# EAGLE board openDrive_MC_00.28 (EAGLE 5.10), part 1 of 2
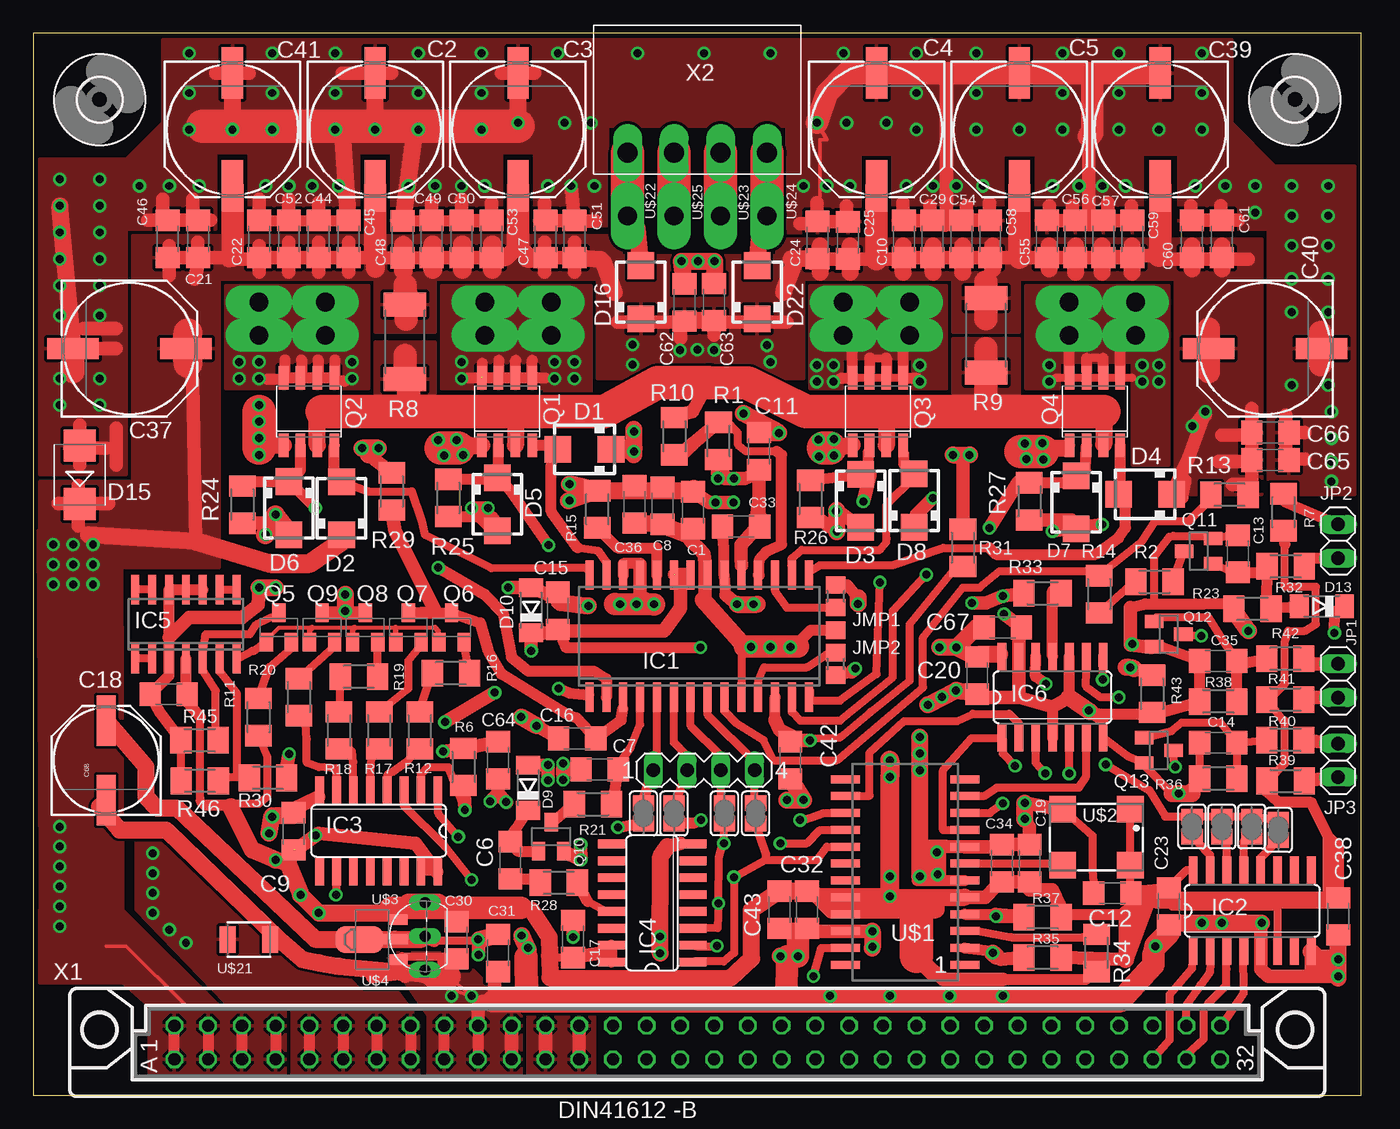
[diagram p0: board, top side]
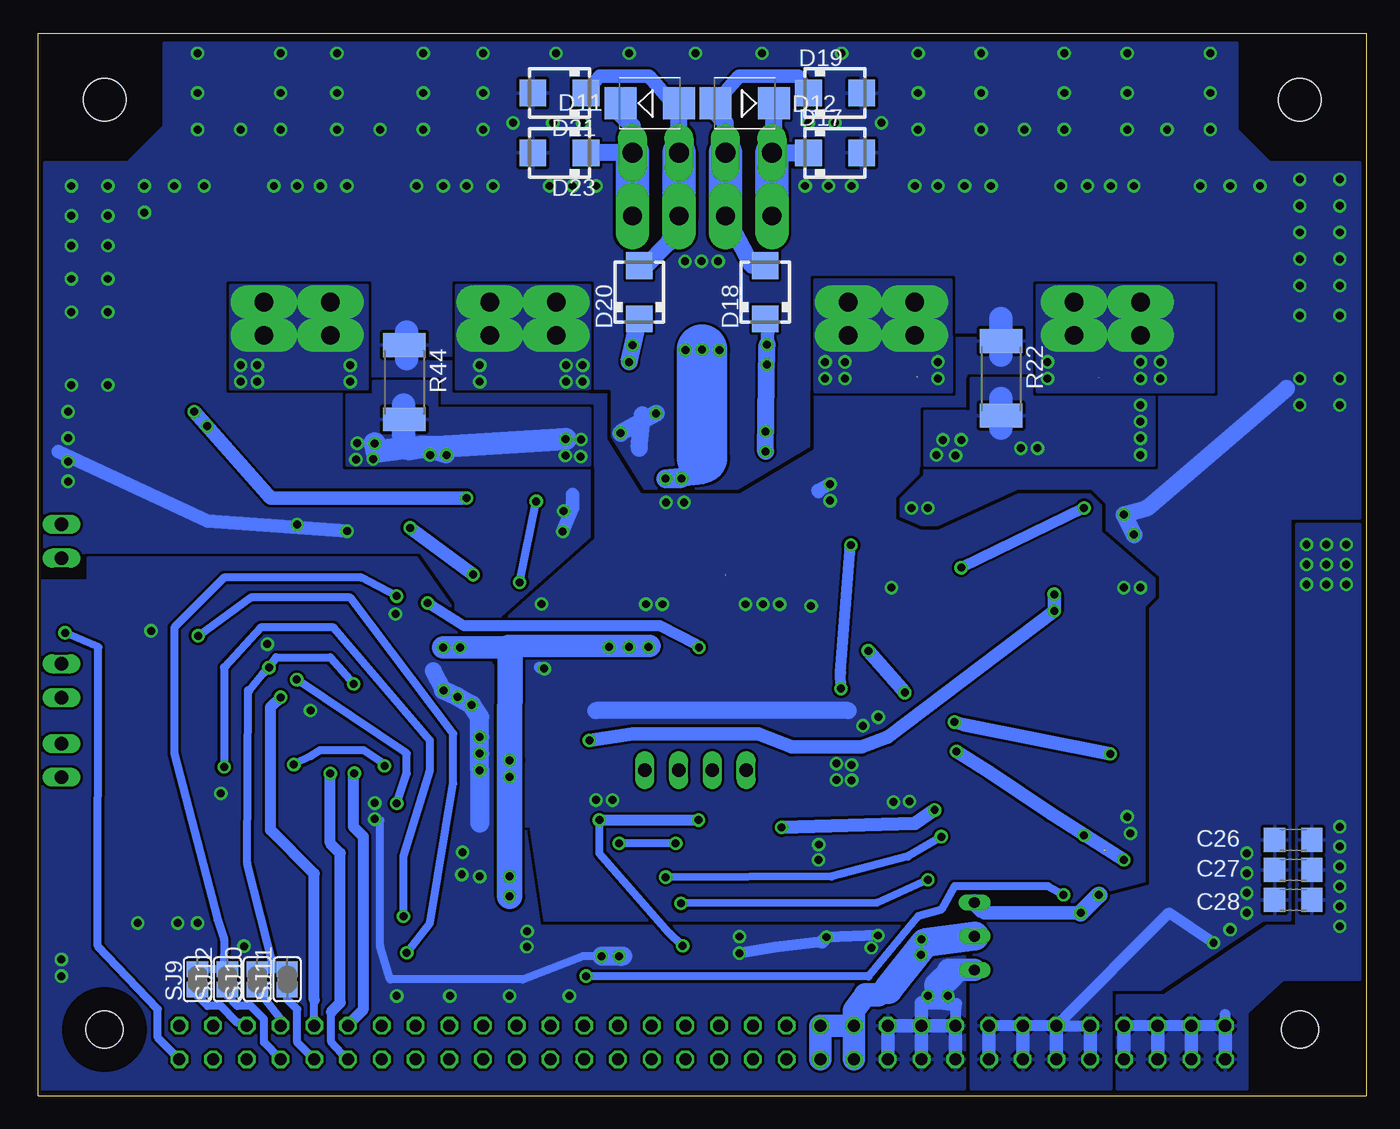
[diagram p1: board, bottom side, seen from below]

Size 100 x 80 mm. Coordinates in mm from the lower left corner, seen from the top.
Outline: 100,0 100,80 0,80 0,0 100,0
Copper layers (1*16): Top 0.035mm / dielectric 1.5mm / Bottom 0.035mm
Design rules "ZWILLING": minimum track width 0.2mm, minimum drill 0.5mm, track to track 0.2mm, track to pad 0.2mm, pad to pad 0.15mm, via to via 0.2mm, smd to smd 0mil, copper to edge 0.2mm, drill to drill 0.2mm, minimum pad ring 0.2mm, minimum via ring 0.2mm, stop-mask expansion 0.1mm, vias tented up to drill 0mil, thermal gap 10mil
bRestrict: 25 lines

## Footprints (pad centres in the part's own frame; a part is rotated, then mirrored left to right if it is on the bottom)
C1206 = smd 1.6 x 1.8: 1 -1.4,0; 2 1.4,0
PANASONIC_G = smd 3.9 x 1.6: + 4.25,0; - -4.25,0
PANASONIC_E = smd 3.8 x 1.4: + 3,0; - -3,0
SMA = smd 2 x 2: A 2,0; C -2,0
SOD80C = smd 1.4 x 1.8: A 1.7,0; C -1.7,0
SMB = smd 2.4 x 2.4: A 2.2,0; C -2.2,0
3,2 = hole 3.2: 0,0
SO28W = smd 0.6 x 2.2: 1 -8.255,-4.6; 2 -6.985,-4.6; 3 -5.715,-4.6; 4 -4.445,-4.6; 5 -3.175,-4.6; 6 -1.905,-4.6; 7 -0.635,-4.6; 8 0.635,-4.6; 9 1.905,-4.6; 10 3.175,-4.6; 11 4.445,-4.6; 12 5.715,-4.6; 13 6.985,-4.6; 14 8.255,-4.6; 15 8.255,4.6; 16 6.985,4.6; 17 5.715,4.6; 18 4.445,4.6; 19 3.175,4.6; 20 1.905,4.6; 21 0.635,4.6; 22 -0.635,4.6; 23 -1.905,4.6; 24 -3.175,4.6; 25 -4.445,4.6; 26 -5.715,4.6; 27 -6.985,4.6; 28 -8.255,4.6
SO16 = smd 0.66 x 2.032: 1 -4.445,-3.073; 2 -3.175,-3.073; 3 -1.905,-3.073; 4 -0.635,-3.073; 5 0.635,-3.073; 6 1.905,-3.073; 7 3.175,-3.073; 8 4.445,-3.073; 9 4.445,3.073; 10 3.175,3.073; 11 1.905,3.073; 12 0.635,3.073; 13 -0.635,3.073; 14 -1.905,3.073; 15 -3.175,3.073; 16 -4.445,3.073
SO14 = smd 0.6 x 2.2: 1 -3.81,-2.6; 2 -2.54,-2.6; 3 -1.27,-2.6; 4 0,-2.6; 5 1.27,-2.6; 6 2.54,-2.6; 7 3.81,-2.6; 8 3.81,2.6; 9 2.54,2.6; 10 1.27,2.6; 11 0,2.6; 12 -1.27,2.6; 13 -2.54,2.6; 14 -3.81,2.6
SO14' = smd 0.66 x 2.032: 1 -3.81,-3.073; 2 -2.54,-3.073; 3 -1.27,-3.073; 4 0,-3.073; 5 1.27,-3.073; 6 2.54,-3.073; 7 3.81,-3.073; 8 3.81,3.073; 9 2.54,3.073; 10 1.27,3.073; 11 0,3.073; 12 -1.27,3.073; 13 -2.54,3.073; 14 -3.81,3.073
B0R-JMP = smd 1.5 x 1.3: 1 0,1.7; 2 0,0; 3 0,-1.7
1X02 = drill 1.016 long: 1 -1.27,0; 2 1.27,0
SO08-IRF = smd 0.72 x 1.78: 1 -1.905,-2.543; 2 -0.635,-2.543; 3 0.635,-2.543; 4 1.905,-2.543; 5 1.905,2.543; 6 0.635,2.543; 7 -0.635,2.543; 8 -1.905,2.543
SOT23-BEC = smd 1 x 1.4: B -0.95,-1.1; C 0,1.1; E 0.95,-1.1
SOT23 = smd 1 x 1.4: 1 -0.95,-1.1; 2 0.95,-1.1; 3 0,1.1
M1206 = smd 1.6 x 2: 1 -1.4,0; 2 1.4,0
R2512 = smd 1.8 x 3.2: 1 -2.8,0; 2 2.8,0
SJ = smd 1.168 x 1.6: 1 -0.762,0; 2 0.762,0
MA04-1 = drill 1.016 long: 1 -3.81,0; 2 -1.27,0; 3 1.27,0; 4 3.81,0
SOP24 = smd 0.6 x 2.2: 1 -6.985,-4.5; 2 -5.715,-4.5; 3 -4.445,-4.5; 4 -3.175,-4.5; 5 -1.905,-4.5; 6 -0.635,-4.5; 7 0.635,-4.5; 8 1.905,-4.5; 9 3.175,-4.5; 10 4.445,-4.5; 11 5.715,-4.5; 12 6.985,-4.5; 13 6.985,4.5; 14 5.715,4.5; 15 4.445,4.5; 16 3.175,4.5; 17 1.905,4.5; 18 0.635,4.5; 19 -0.635,4.5; 20 -1.905,4.5; 21 -3.175,4.5; 22 -4.445,4.5; 23 -5.715,4.5; 24 -6.985,4.5
XO91 = smd 2 x 2: 1 -2.61,-2.07; 2 2.49,-2.07; 3 2.49,2.13; 4 -2.61,2.13
TO92 = drill 0.813 long: 1 -2.54,0; 2 0,0; 3 2.54,0
SOT89 = smd 0.8 x 1.4: 1 -1.499,-1.981; 3 1.499,-1.981 | smd 0.8 x 2.032: 2 0.025,-1.727 | smd 2.032 x 3.65: 4 0,0.94
PAD = drill 1.4 pad 2.54 long: 1 0,0
1210 = smd 1.2 x 2: 1 -1.6,0; 2 1.6,0
FAB64S = drill 0.914 octagon: A1 -1.27,39.37; A2 -1.27,36.83; A3 -1.27,34.29; A4 -1.27,31.75; A5 -1.27,29.21; A6 -1.27,26.67; A7 -1.27,24.13; A8 -1.27,21.59; A9 -1.27,19.05; A10 -1.27,16.51; A11 -1.27,13.97; A12 -1.27,11.43; A13 -1.27,8.89; A14 -1.27,6.35; A15 -1.27,3.81; A16 -1.27,1.27; A17 -1.27,-1.27; A18 -1.27,-3.81; A19 -1.27,-6.35; A20 -1.27,-8.89; A21 -1.27,-11.43; A22 -1.27,-13.97; A23 -1.27,-16.51; A24 -1.27,-19.05; A25 -1.27,-21.59; A26 -1.27,-24.13; A27 -1.27,-26.67; A28 -1.27,-29.21; A29 -1.27,-31.75; A30 -1.27,-34.29; A31 -1.27,-36.83; A32 -1.27,-39.37; B1 1.27,39.37; B2 1.27,36.83; B3 1.27,34.29; B4 1.27,31.75; B5 1.27,29.21; B6 1.27,26.67; B7 1.27,24.13; B8 1.27,21.59; B9 1.27,19.05; B10 1.27,16.51; B11 1.27,13.97; B12 1.27,11.43; B13 1.27,8.89; B14 1.27,6.35; B15 1.27,3.81; B16 1.27,1.27; B17 1.27,-1.27; B18 1.27,-3.81; B19 1.27,-6.35; B20 1.27,-8.89; B21 1.27,-11.43; B22 1.27,-13.97; B23 1.27,-16.51; B24 1.27,-19.05; B25 1.27,-21.59; B26 1.27,-24.13; B27 1.27,-26.67; B28 1.27,-29.21; B29 1.27,-31.75; B30 1.27,-34.29; B31 1.27,-36.83; B32 1.27,-39.37 | hole 2.794: 0.965,-45.009; 0.965,45.009
AKL182-04 = drill 1.5 pad 2.184 long: P$1 -5.25,0; P$2 -1.75,0; P$3 1.75,0; P$4 5.25,0

## Placement (x,y rotation side)
C1  4µ7  [C1206]  49.67,44.08 90 top
C2  330µ  [PANASONIC_G]  25.75,72.75 270 top
C3  330µ  [PANASONIC_G]  36.5,72.75 270 top
C4  330µ  [PANASONIC_G]  63.5,72.75 270 top
C5  330µ  [PANASONIC_G]  74.25,72.75 270 top
C6  10p  [C1206]  35.92,17.73 90 top
C7  680p  [C1206]  42.65,24.57 180 top
C8  100n  [C1206]  47.38,44.42 90 top
C9  100n  [C1206]  19.6,19.9 90 top
C10  4µ7  [C1206]  65.58,64.5 90 top
C11  1µ  [C1206]  54.65,48.52 90 top
C12  100n  [C1206]  81.25,15.25 180 top
C13  4n7  [C1206]  90.7,40.8 90 top
C14  4n7  [C1206]  89.22,26.57 180 top
C15  4µ7  [C1206]  39.5,36.5 90 top
C16  4n7  [C1206]  40.95,26.9 180 top
C17  100n  [C1206]  40.65,11.8 90 top
C18  100n  [C1206]  10.2,30.23 180 top
C19  1µ  [C1206]  75.03,17.5 90 top
C20  100n  [C1206]  71.08,31.62 270 top
C21  4µ7  [C1206]  12.43,64.5 90 top
C22  4µ7  [C1206]  17,64.5 90 top
C23  100n  [C1206]  85.5,14.25 270 top
C24  4µ7  [C1206]  59.05,64.42 90 top
C25  4µ7  [C1206]  61.35,64.4 90 top
C26  100n  [C1206]  5.5,19.25 180 bottom
C27  10n  [C1206]  5.5,17 180 bottom
C28  1n  [C1206]  5.5,14.75 180 bottom
C29  4µ7  [C1206]  67.7,64.5 90 top
C30  1µ  [C1206]  31.88,11.7 270 top
C31  1µ  [C1206]  35,10.75 270 top
C32  100n  [C1206]  58.25,14 270 top
C33  1µ  [C1206]  53.3,42.85 180 top
C34  470n  [C1206]  72.92,17.5 90 top
C35  4n7  [C1206]  89.22,32.73 180 top
C36  1µ  [C1206]  45.27,44.52 90 top
C37  330µ  [PANASONIC_G]  7.25,56.25 0 top
C38  1µ  [C1206]  98.25,13.5 270 top
C39  330µ  [PANASONIC_G]  84.85,72.75 270 top
C40  330µ  [PANASONIC_G]  92.75,56.25 180 top
C41  330µ  [PANASONIC_G]  15,72.75 270 top
C42  4n7  [C1206]  57,25.25 270 top
C43  1µ  [C1206]  56.17,14 270 top
C44  4µ7  [C1206]  21.5,64.5 90 top
C45  4µ7  [C1206]  23.75,64.5 90 top
C46  4µ7  [C1206]  10.12,64.5 90 top
C47  4µ7  [C1206]  38.58,64.5 90 top
C48  4µ7  [C1206]  27.82,64.47 90 top
C49  4µ7  [C1206]  30,64.5 90 top
C50  4µ7  [C1206]  32.25,64.5 90 top
C51  4µ7  [C1206]  40.75,64.5 90 top
C52  4µ7  [C1206]  19.25,64.5 90 top
C53  4µ7  [C1206]  34.5,64.5 90 top
C54  4µ7  [C1206]  69.9,64.5 90 top
C55  4µ7  [C1206]  76.33,64.5 90 top
C56  4µ7  [C1206]  78.45,64.5 90 top
C57  4µ7  [C1206]  80.58,64.5 90 top
C58  4µ7  [C1206]  72.05,64.5 90 top
C59  4µ7  [C1206]  82.75,64.5 90 top
C60  4µ7  [C1206]  87.25,64.5 90 top
C61  4µ7  [C1206]  89.5,64.5 90 top
C62  1n  [C1206]  49.05,59.73 90 top
C63  1n  [C1206]  51.27,59.75 90 top
C64  100n  [C1206]  35,25.25 270 top
C65  100n  [C1206]  93.15,47.85 0 top
C66  1µ  [C1206]  93.15,49.92 0 top
C67  4µ7  [C1206]  73,35.25 0 top
C68  220µ  [PANASONIC_E]  5.5,25.25 90 top
D1  SS14  [SMA]  41.51,48.66 180 top
D2  SS14  [SMA]  23.22,44.22 90 top
D3  SS14  [SMA]  66.33,44.81 90 top
D4  SS14  [SMA]  83.72,45.29 180 top
D5  SS14  [SMA]  34.94,44.53 270 top
D6  SS14  [SMA]  19.26,44.24 270 top
D7  SS14  [SMA]  78.51,44.68 270 top
D8  SS14  [SMA]  62.3,44.78 270 top
D9  BAS32  [SOD80C]  37.27,23.18 90 top
D10  3V0  [SOD80C]  37.48,36.55 90 top
D11  P6SMB 33CA  [SMB]  53.95,74.72 0 bottom
D12  P6SMB 33CA  [SMB]  46.8,74.72 180 bottom
D13  BAS32  [SOD80C]  97.03,36.85 180 top
D15  P6SMB 33CA  [SMB]  3.5,46.75 90 top
D16  SS14  [SMA]  45.75,60.5 90 top
D17  SS14  [SMA]  40,71 0 bottom
D18  SS14  [SMA]  45.25,60.5 90 bottom
D19  SS14  [SMA]  40,75.5 0 bottom
D20  SS14  [SMA]  54.75,60.5 90 bottom
D21  SS14  [SMA]  60.75,75.5 180 bottom
D22  SS14  [SMA]  54.5,60.5 90 top
D23  SS14  [SMA]  60.75,71 180 bottom
H1  MOUNT-HOLE3.2  [3,2]  5,75 0 top
H2  MOUNT-HOLE3.2  [3,2]  95,75 0 top
IC1  TMC249  [SO28W]  50.14,34.6 0 top
IC2  74HC138D  [SO16]  91.78,13.92 0 top
IC3  4094D  [SO16]  26.02,19.94 180 top
IC4  4094D  [SO16]  46.6,14.51 90 top
IC5  LM324D  [SO14]  11.5,35.5 0 top
IC6  74HC125D  [SO14']  76.75,30 0 top
JMP1  0R-JUMPB  [B0R-JMP]  60.42,33.35 0 top
JMP2  0R-JUMPB  [B0R-JMP]  60.42,36.75 180 top
JP1  Left Ref. Switch  [1X02]  98.25,31.25 90 top
JP2  STOP Switch  [1X02]  98.25,41.75 270 top
JP3  Right Ref. Switch  [1X02]  98.25,25.25 90 top
Q1  FDS8960  [SO08-IRF]  35.67,51.51 0 top
Q2  FDS8960  [SO08-IRF]  20.76,51.51 0 top
Q3  FDS8960  [SO08-IRF]  63.6,51.51 0 top
Q4  FDS8960  [SO08-IRF]  79.94,51.51 0 top
Q5  BC856ASMD  [SOT23-BEC]  18.5,35.25 0 top
Q6  BC856ASMD  [SOT23-BEC]  31.5,35.25 0 top
Q7  BC856ASMD  [SOT23-BEC]  28.25,35.25 0 top
Q8  BC856ASMD  [SOT23-BEC]  25,35.25 0 top
Q9  BC856ASMD  [SOT23-BEC]  21.75,35.25 0 top
Q10  BC846ASMD  [SOT23]  39,19.5 0 top
Q11  BC846ASMD  [SOT23]  87.75,41 90 top
Q12  BC846ASMD  [SOT23]  85.5,34.75 270 top
Q13  BC846ASMD  [SOT23]  84.75,26 270 top
R1  56  [M1206]  51.6,49.3 270 top
R2  1k  [M1206]  84.42,38.7 180 top
R6  120k  [M1206]  32.4,24.75 90 top
R7  4k7  [M1206]  94.15,43.92 270 top
R8  0.1  [R2512]  28,56.75 90 top
R9  0.1  [R2512]  71.75,57.25 90 top
R10  100  [M1206]  48.27,49.65 90 top
R11  10k  [M1206]  16.95,28.5 90 top
R12  10k  [M1206]  29.1,27.5 90 top
R13  120k  [M1206]  90.08,45.25 0 top
R14  4k7  [M1206]  80.25,37.75 90 top
R15  4k7  [M1206]  42.48,44.15 270 top
R16  10k  [M1206]  31.45,31.8 0 top
R17  10k  [M1206]  26.05,27.5 90 top
R18  10k  [M1206]  23.02,27.5 90 top
R19  10k  [M1206]  24.52,31.55 0 top
R20  10k  [M1206]  20,30 90 top
R21  4k7  [M1206]  42.15,21.95 180 top
R22  0.1  [R2512]  27.5,54 270 bottom
R23  33k  [M1206]  91.8,36.65 0 top
R24  470k  [M1206]  15.75,44.5 90 top
R25  470k  [M1206]  31.25,45 90 top
R26  470k  [M1206]  58.52,44.92 90 top
R27  470k  [M1206]  75,44.75 90 top
R28  1k  [M1206]  39.58,16.02 0 top
R29  100  [M1206]  27,45.5 90 top
R30  120k  [M1206]  17.68,23.93 0 top
R31  100  [M1206]  70,41.25 90 top
R32  4k7  [M1206]  94.3,39.85 0 top
R33  4k7  [M1206]  76,37.83 180 top
R34  33k  [M1206]  80.08,10.75 270 top
R35  33k  [M1206]  76,10.4 0 top
R36  33k  [M1206]  89.22,23.88 0 top
R37  33k  [M1206]  76,13.45 0 top
R38  33k  [M1206]  89.22,29.68 0 top
R39  4k7  [M1206]  94.3,23.7 180 top
R40  4k7  [M1206]  94.28,26.77 0 top
R41  4k7  [M1206]  94.28,29.82 180 top
R42  4k7  [M1206]  94.28,32.9 0 top
R43  120k  [M1206]  84.25,30.25 90 top
R44  0.1  [R2512]  72.42,53.73 270 bottom
R45  2k7  [M1206]  12.53,26.75 0 top
R46  22k  [M1206]  12.55,23.7 0 top
SJ1  ADR_CS_0  [SJ]  87.25,20.25 90 top
SJ2  ADR_CS_1  [SJ]  89.5,20.25 90 top
SJ3  ADR_CS_2  [SJ]  91.75,20.25 90 top
SJ4  ADR_CS_3  [SJ]  93.75,20 90 top
SJ5  [SJ]  52.05,21.25 90 top
SJ6  [SJ]  48.25,21.25 90 top
SJ7  [SJ]  45.95,21.25 90 top
SJ8  [SJ]  54.4,21.25 90 top
SJ9  I_Set_Sense_DEC  [SJ]  88,8.75 90 bottom
SJ10  PWM_DEC  [SJ]  83.5,8.75 90 bottom
SJ11  PWM_RA  [SJ]  81.25,8.75 90 bottom
SJ12  I_Set_Sense_RA  [SJ]  85.75,8.75 90 bottom
SV1  SPI_TEST_TMC249  [MA04-1]  50.5,24.5 0 top
U$1  TMC428  [SOP24]  65.65,16.84 90 top
U$2  XO91  [XO91]  80,19.5 180 top
U$3  MCP1702  [TO92]  29.5,12 90 top
U$4  MCP1702SMD  [SOT89]  25.5,11.75 90 top
U$5  PIN1  [PAD]  39,59.75 180 top
U$6  PIN1  [PAD]  34,59.75 180 top
U$7  PIN1  [PAD]  39,57.25 180 top
U$8  PIN1  [PAD]  34,57.25 180 top
U$9  PIN1  [PAD]  17,59.75 180 top
U$10  PIN1  [PAD]  22,57.25 180 top
U$11  PIN1  [PAD]  22,59.75 180 top
U$12  PIN1  [PAD]  17,57.25 180 top
U$13  PIN1  [PAD]  61,57.25 180 top
U$14  PIN1  [PAD]  66,57.25 180 top
U$15  PIN1  [PAD]  61,59.75 180 top
U$16  PIN1  [PAD]  66,59.75 180 top
U$17  PIN1  [PAD]  78,59.75 180 top
U$18  PIN1  [PAD]  78,57.25 180 top
U$19  PIN1  [PAD]  83,57.25 180 top
U$20  PIN1  [PAD]  83,59.75 180 top
U$21  2µ2  [1210]  16.25,11.75 180 top
U$22  PIN1  [PAD]  44.75,66.25 90 top
U$23  PIN1  [PAD]  51.75,66.25 90 top
U$24  PIN1  [PAD]  55.25,66.25 90 top
U$25  PIN1  [PAD]  48.25,66.25 90 top
X1  FAB64SE  [FAB64S]  50,4 90 top
X2  AKL18X-04W  [AKL182-04]  50,71 180 top

## Library data of the parts
C1 C6-C36 C38 C42-C67 R1 R2 R6-R46 = rcl
C2-C5 C37 C39-C41 C68 U$21 = SparkFun
D1-D13 D15-D23 = diode
H1 H2 = holes
IC1 = tmc
IC2 IC6 = 74xx-eu
IC3 IC4 = 40xx
IC5 = linear
JMP1 JMP2 = jump-0r-smd
JP1-JP3 = pinhead
Q1-Q4 = transistor-fet
Q5-Q9 = transistor-pnp
Q10-Q13 = transistor-npn
SJ1-SJ12 = jumper
SV1 = con-lstb
U$1 = tmc428
U$2 = euroquartz
U$3 U$4 = mcp1702
U$5-U$20 U$22-U$25 = con-faston
X1 = con-vg
X2 = con-riacon_akl

## Nets
+30V: C2.+ C3.+ C4.+ C5.+ C10.1 C11.1 C21.1 C22.1 C24.1 C25.1 C26.1 C27.1 C28.1 C29.1 C33.1 C37.+ C39.+ C40.+ C41.+ C44.1 C45.1 C46.1 C47.1 C48.1 C49.1 C50.1 C51.1 C52.1 C53.1 C54.1 C55.1 C56.1 C57.1 C58.1 C59.1 C60.1 C61.1 C62.1 C63.1 C65.1 C66.1 D1.C D2.C D3.C D4.C D15.C D16.C D18.C D20.C D22.C IC1.19 R1.2 R8.2 R9.2 R13.2 X1.A1 X1.A2 X1.A3 X1.A4 X1.B1 X1.B2 X1.B3 X1.B4
AGND: C1.2 C2.- C3.- C4.- C5.- C7.2 C8.2 C9.2 C10.2 C11.2 C15.2 C16.2 C18.2 C21.2 C22.2 C24.2 C25.2 C26.2 C27.2 C28.2 C29.2 C33.2 C36.2 C37.- C39.- C40.- C41.- C42.2 C44.2 C45.2 C46.2 C47.2 C48.2 C49.2 C50.2 C51.2 C52.2 C53.2 C54.2 C55.2 C56.2 C57.2 C58.2 C59.2 C60.2 C61.2 C62.2 C63.2 C64.2 C65.2 C66.2 D5.A D6.A D7.A D8.A D9.A D10.A D15.A D17.A D19.A D21.A D23.A IC1.20 IC1.25 IC1.26 IC3.8 IC5.3 IC5.10 IC5.11 IC5.12 JMP1.3 JMP2.3 Q10.2 R15.1 R22.1 R24.1 R25.1 R26.1 R27.1 R44.1 R45.1 R46.1 U$21.2 X1.A5 X1.A6 X1.A7 X1.A8 X1.B5 X1.B6 X1.B7 X1.B8
GND: C12.2 C13.2 C14.2 C17.2 C19.2 C20.2 C23.2 C30.2 C31.2 C32.2 C34.2 C35.2 C38.2 C43.2 C67.2 C68.- IC2.5 IC2.8 IC4.8 IC6.4 IC6.7 IC6.10 IC6.13 Q11.2 Q12.2 Q13.2 R23.1 R36.1 R38.1 R43.1 U$1.6 U$1.8 U$1.22 U$2.2 U$3.1 U$4.1 U$21.1 X1.A9 X1.A10 X1.A11 X1.B9 X1.B10 X1.B11
N$1: D4.A IC1.15 Q4.4
N$2: U$1.7 U$2.3
N$3: D3.A IC1.16 Q3.4
N$4: IC6.5 X1.A27
N$5: Q4.5 Q4.6 Q4.7 Q4.8 U$17.1 U$18.1 U$19.1 U$20.1
N$6: Q1.1 Q2.1 R22.2 R29.2
N$7: Q3.5 Q3.6 Q3.7 Q3.8 U$13.1 U$14.1 U$15.1 U$16.1
N$8: D2.A IC1.28 Q2.4
N$9: Q2.5 Q2.6 Q2.7 Q2.8 U$9.1 U$10.1 U$11.1 U$12.1
N$10: D5.C IC1.1 Q1.2 R25.2
N$11: D1.A IC1.27 Q1.4
N$12: Q1.5 Q1.6 Q1.7 Q1.8 U$5.1 U$6.1 U$7.1 U$8.1
N$13: D6.C IC1.2 Q2.2 R24.2
N$14: C7.1 IC1.4 R21.1
N$15: D7.C IC1.13 Q4.2 R27.2
N$16: C15.1 D10.C IC1.22 IC1.23 R30.2 R33.2 SJ9.2 SJ12.2
N$17: IC1.18 R1.1 R10.1
N$18: IC5.6 R30.1 R46.2
N$19: IC1.7 SJ5.2 SV1.3
N$20: C16.1 IC1.3 Q6.C Q7.C R29.1
N$21: Q6.E R16.2
N$22: C42.1 IC1.12 Q8.C Q9.C R31.1
N$23: Q7.E R17.2
N$24: IC1.11 JMP1.2
N$25: IC5.7 Q5.B Q6.B Q7.B Q8.B Q9.B
N$26: Q8.E R19.2
N$27: Q9.E R20.2
N$28: IC1.24 R15.2
N$29: R12.2 R16.1
N$30: R18.2 R19.1
N$31: IC3.4 R12.1
N$32: IC3.5 R17.1
N$33: IC3.6 R18.1
N$34: IC3.7 R20.1
N$35: IC4.2 SJ6.1 U$1.15
N$36: IC3.3 IC4.3 SJ5.1 U$1.16
N$37: IC3.1 IC4.1 SJ8.1 U$1.17
N$38: IC3.10 U$1.23
N$39: IC3.2 R6.1 SJ7.1
N$40: IC1.17 JMP2.2
N$41: IC6.9 X1.B28
N$42: Q1.3 Q2.3 Q3.3 Q4.3 R8.1 R9.1 R10.2
N$43: JP2.1 R7.1
N$44: JP2.2 R32.2
N$45: D8.C IC1.14 Q3.2 R26.2
N$46: IC6.2 U$1.14
N$47: Q10.3 R21.2
N$48: R2.2 R14.1
N$49: C6.2 D9.C Q10.1
N$50: IC5.1 IC5.2
N$51: IC4.13 R28.2
N$52: C6.1 R28.1
N$53: IC5.8 IC5.9
N$54: IC5.13 IC5.14
N$55: IC6.11 R33.1
N$56: IC1.9 R13.1 R14.2
N$57: IC5.5 Q5.C R45.2
N$58: IC6.8 U$1.10
N$59: Q5.E R11.2
N$60: IC6.6 U$1.11
N$61: IC6.1 SJ1.2 SJ2.2 SJ3.2 SJ4.2 U$1.9
N$62: IC2.15 SJ1.1
N$63: IC2.14 SJ2.1
N$64: IC2.13 SJ3.1
N$65: IC2.12 SJ4.1
N$66: IC2.2 X1.B31
N$67: IC2.4 X1.B32
N$68: IC2.3 X1.A31
N$69: IC2.1 X1.A30
N$70: D12.C D16.A D17.C U$22.1 X2.P$4
N$71: Q11.3 R2.1
N$72: IC6.3 X1.B27
N$73: IC6.12 R43.2 SJ10.2 SJ11.2
N$74: C13.1 D13.A Q11.1 R23.2 R32.1
N$75: C31.1 C68.+ U$3.2 U$4.2 X1.A12 X1.A13 X1.B12 X1.B13
N$76: D13.C X1.A32
N$77: Q12.3 R35.1 U$1.2
N$78: R34.1 U$1.3
N$79: Q13.3 R37.1 U$1.4
N$80: D11.C D22.A D23.C U$24.1 X2.P$1
N$81: SJ10.1 X1.B29
N$82: C35.1 Q12.1 R38.2 R42.1
N$83: JP1.2 R42.2
N$84: JP1.1 R41.1
N$85: C14.1 Q13.1 R36.2 R40.1
N$86: JP3.2 R40.2
N$87: JP3.1 R39.1
N$88: IC1.6 SJ6.2 SV1.2
N$89: IC1.5 SJ7.2 SV1.1
N$90: IC1.8 SJ8.2 SV1.4
N$91: Q3.1 Q4.1 R31.2 R44.2
N$92: SJ11.1 X1.A28
N$93: SJ12.1 X1.A29
N$94: D12.A D18.A D19.C U$25.1 X2.P$3
N$95: D11.A D20.A D21.C U$23.1 X2.P$2
N$96: SJ9.1 X1.B30
VCC: C1.1 C8.1 C9.1 C12.1 C17.1 C18.1 C19.1 C20.1 C23.1 C30.1 C32.1 C34.1 C36.1 C38.1 C43.1 C64.1 C67.1 IC1.10 IC1.21 IC2.6 IC2.16 IC3.15 IC3.16 IC4.15 IC4.16 IC5.4 IC6.14 JMP1.1 JMP2.1 R6.2 R7.2 R11.1 R34.2 R35.2 R37.2 R39.2 R41.2 U$1.5 U$1.20 U$1.21 U$2.1 U$2.4 U$3.3 U$4.3